# Altium PCB GPS_WS_NEO7M трафарет BOTTOM.PcbDoc
Units mm, origin at the board's own origin, x right, y up, seen from the top; angles counter-clockwise.
Board outline 32.5 x 32.5 mm, 4 copper layers (Bottom Layer, GND, PWR, Top Layer), stack 1.17 mm thick; 15 components, 25 nets, 39 pads, 0 vias.
Unrouted connection lines stored in the file: 27.
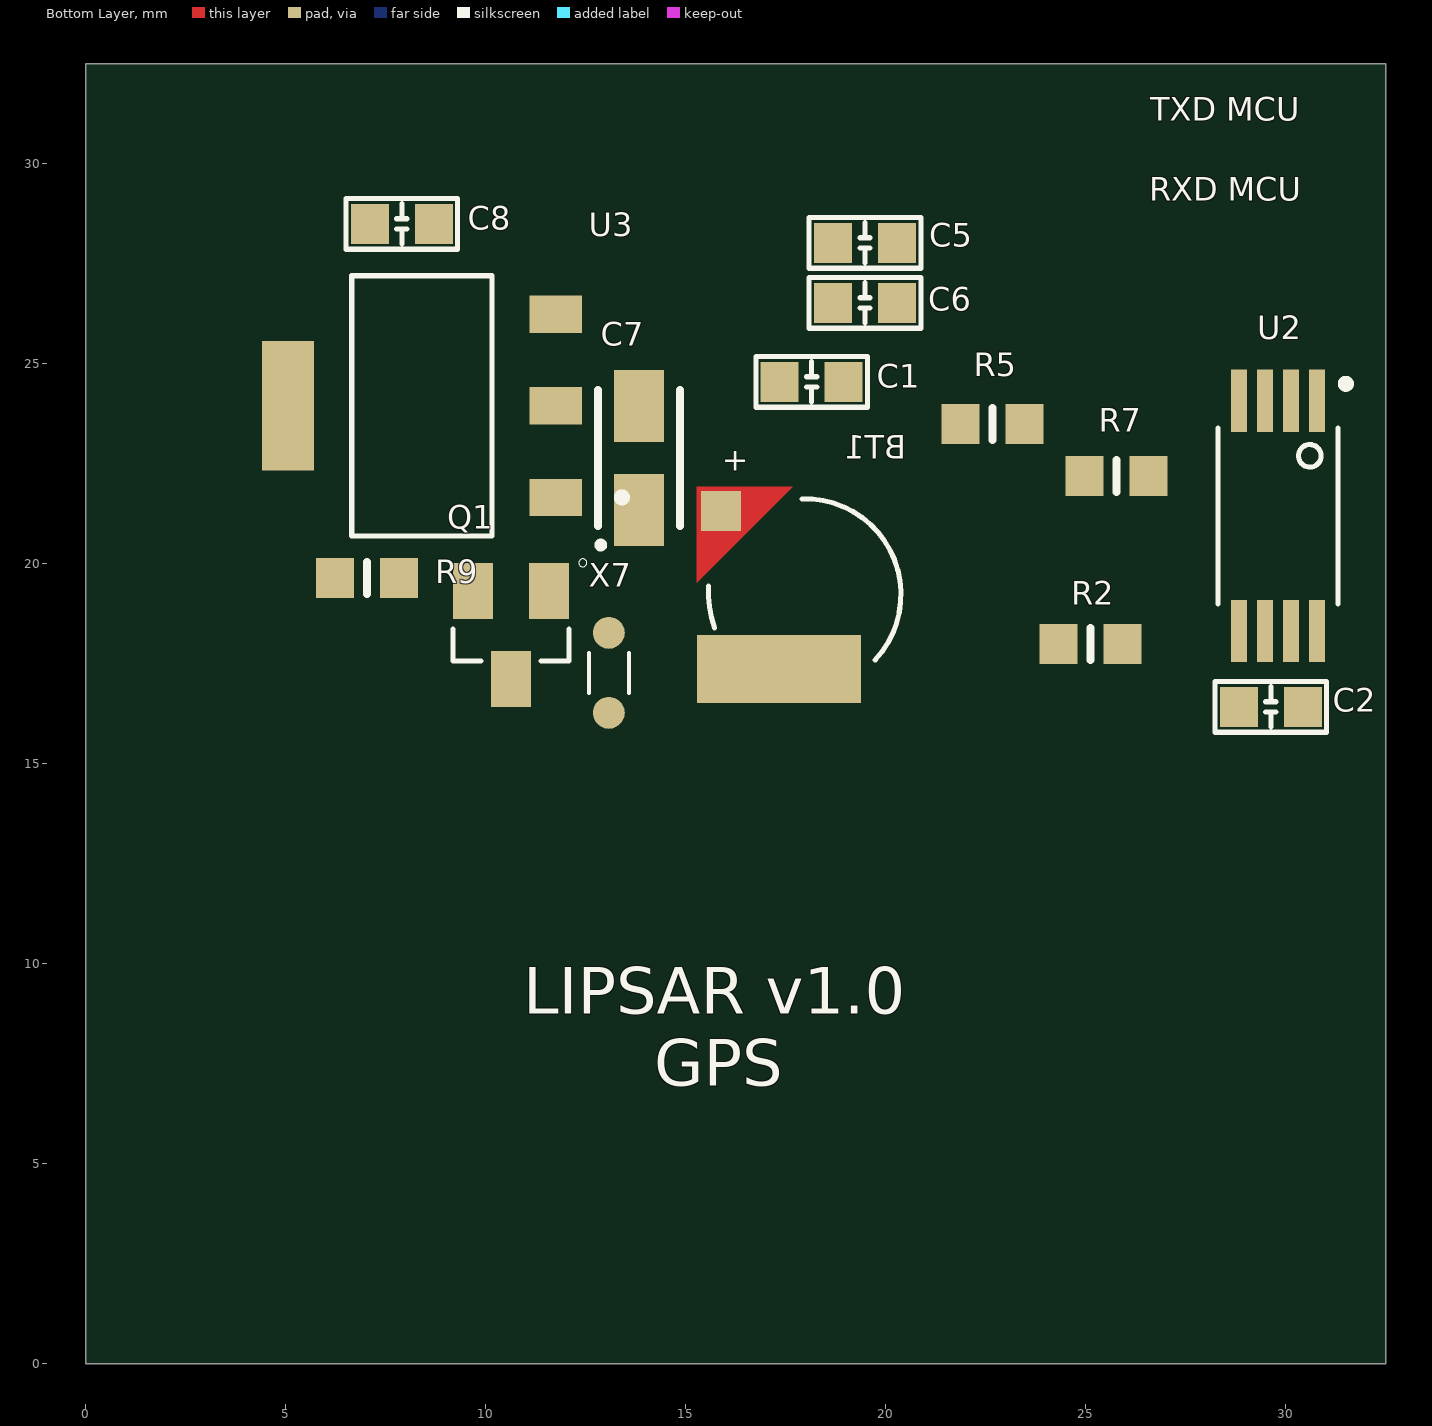
[diagram p0: Bottom Layer view]
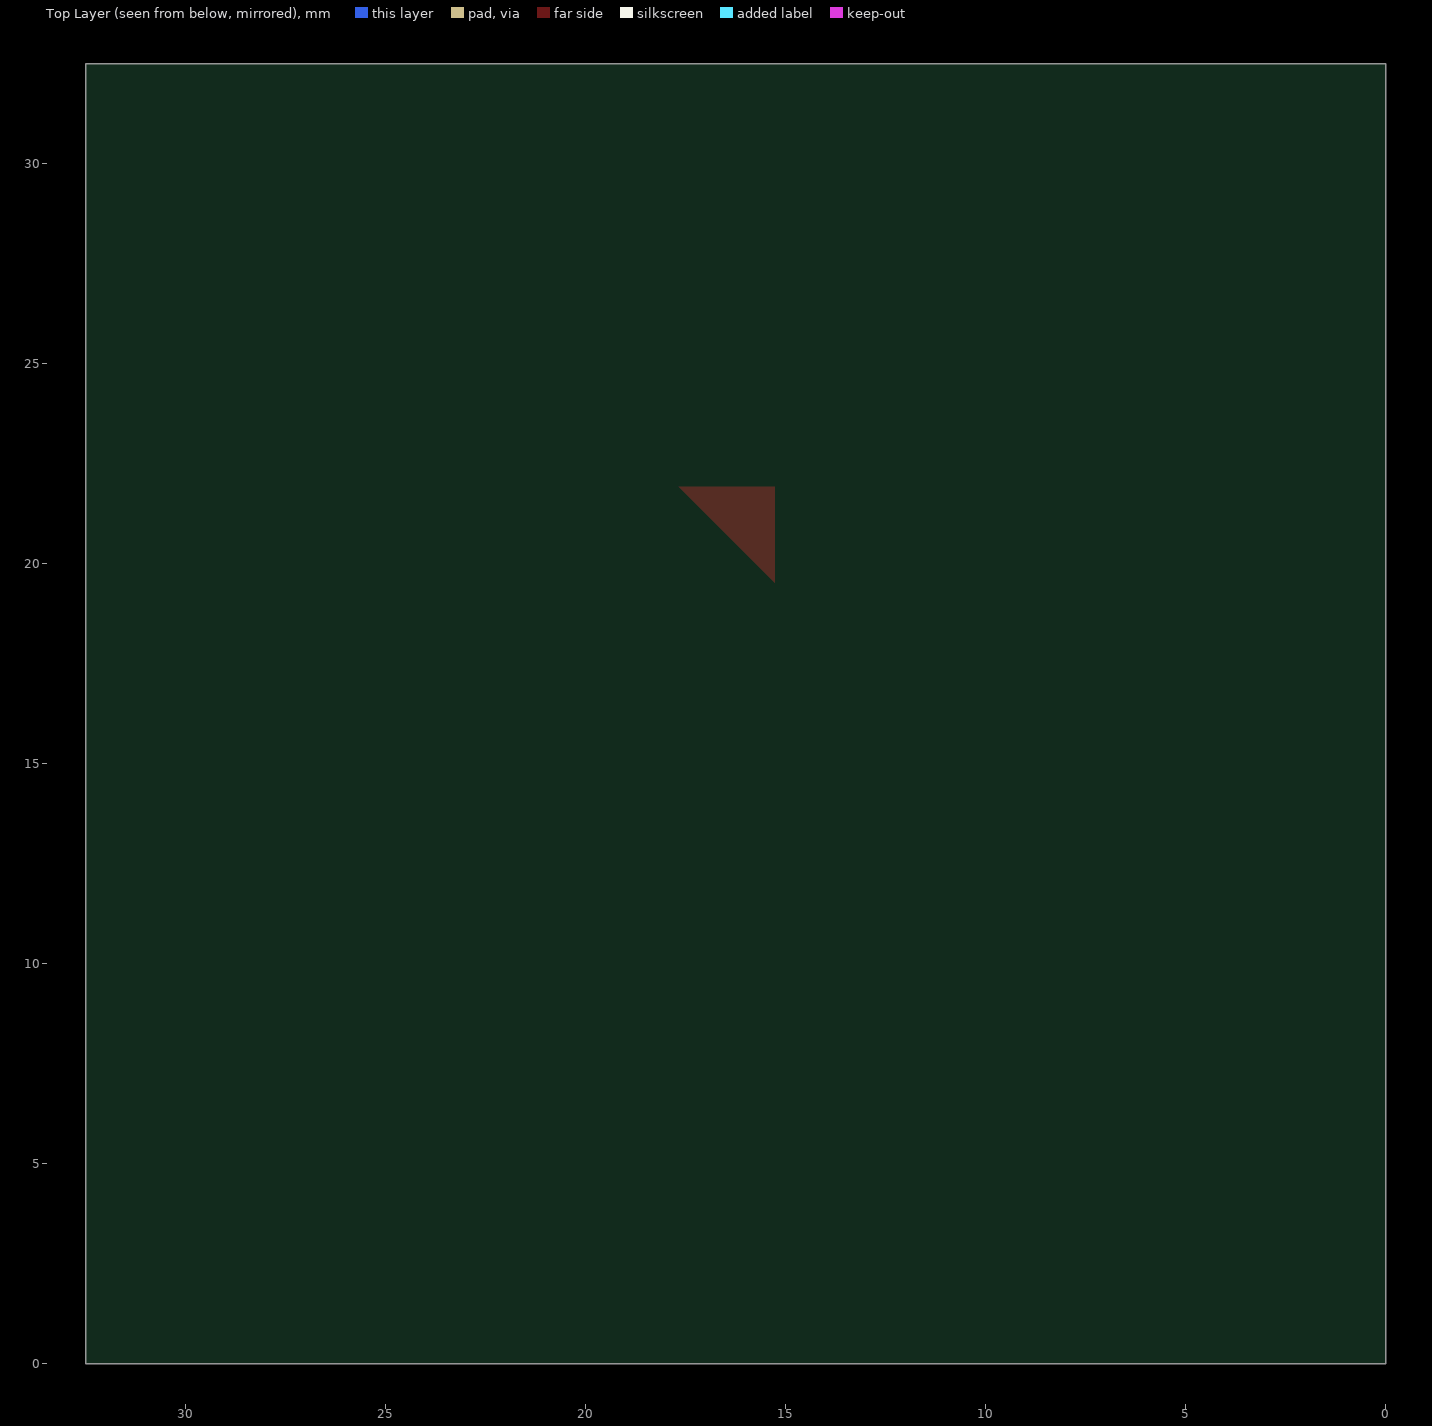
[diagram p1: Top Layer view, seen from below]

## Layer stack, top to bottom
Top Solder: solder mask 0.0254, SM-002, Dk 4
Bottom Layer: signal copper 0.045
Dielectric 2: prepreg 0.125, FR4_HiTg170 PR, Dk 5.07
Dielectric 3: prepreg 0.125, FR4_HiTg170 PR, Dk 5.07
Dielectric 8: prepreg 0.125, FR4_HiTg170 PR, Dk 5.07
GND: signal copper 0.015
Dielectric 1: core 0.3, FR4 Tg150, Dk 4.6
PWR: signal copper 0.015
Dielectric 9: prepreg 0.125, FR4_HiTg170 PR, Dk 5.07
Dielectric 4: prepreg 0.125, FR4_HiTg170 PR, Dk 5.07
Dielectric 5: prepreg 0.125, FR4_HiTg170 PR, Dk 5.07
Top Layer: signal copper 0.045
Bottom Solder: solder mask 0.0254, SM-002, Dk 4

## Board outline
0,0 0,32.5 32.5,32.5 32.5,0

## Design rules (kind name [scope] priority, off if disabled: settings)
AcuteAngle [All] p1: minimum=3.50000000000000E+0001 checktracksonly=FALSE
BoardOutlineClearance "BoardOutlineClearance 1" [All] p1: gap=0.25 ignorepadtopadclearanceinfootprint=FALSE except(0: Arc-SplitContinuation Track-SplitContinuation SMDPad-SplitContinuation THPad-SplitContinuation Via-SplitContinuation Fill-SplitContinuation Poly-SplitContinuation Region-SplitContinuation Text-SplitContinuation) // Milling
BoardOutlineClearance "BoardOutlineClearance 2" [All] p2: gap=0.4 ignorepadtopadclearanceinfootprint=FALSE except(0: Arc-SplitContinuation Track-SplitContinuation SMDPad-SplitContinuation THPad-SplitContinuation Via-SplitContinuation Fill-SplitContinuation Poly-SplitContinuation Region-SplitContinuation Text-SplitContinuation) // V-Cut
Clearance "Stitching GND" [IsStitchingVia and InNet('GND') vs (IsVia and (Not IsStitchingVia)) Or IsPad] p1: gap=0.127 ignorepadtopadclearanceinfootprint=FALSE
Clearance "Clearance-1 1/2 Oz" [All] p2: gap=0.125 ignorepadtopadclearanceinfootprint=FALSE except(0.2: Arc-Fill Arc-Poly Track-Fill Track-Poly SMDPad-SMDPad SMDPad-Fill SMDPad-Poly THPad-Fill THPad-Poly Via-Fill Via-Poly Fill-Fill Fill-Poly Poly-Poly Poly-Region Poly-Text; 0.25: Arc-Hole Track-Hole SMDPad-Hole THPad-Hole Via-Hole Fill-Hole Poly-Hole Region-Hole Text-Hole) // Standart
DiffPairsRouting "DiffPairsRouting 1 Oz" [All] p1: maxlimit=0.254 minlimit=0.2 mostfreqgap=0.254 toplayer_minwidth=0.2 toplayer_maxwidth=0.381 toplayer_prefwidth=0.381 midlayer1_minwidth=0.2 midlayer1_maxwidth=0.381 midlayer1_prefwidth=0.381 midlayer2_minwidth=0.2 midlayer2_maxwidth=0.381 midlayer2_prefwidth=0.381 bottomlayer_minwidth=0.2 bottomlayer_maxwidth=0.381 bottomlayer_prefwidth=0.381 maxuncoupledlength=12.7
DiffPairsRouting "DiffPairsRouting 1/2 Oz" [All] p2: maxlimit=0.254 minlimit=0.1 mostfreqgap=0.254 toplayer_minwidth=0.1 toplayer_maxwidth=0.381 toplayer_prefwidth=0.381 midlayer1_minwidth=0.1 midlayer1_maxwidth=0.381 midlayer1_prefwidth=0.381 midlayer2_minwidth=0.1 midlayer2_maxwidth=0.381 midlayer2_prefwidth=0.381 bottomlayer_minwidth=0.1 bottomlayer_maxwidth=0.381 bottomlayer_prefwidth=0.381 maxuncoupledlength=12.7
HoleSize "Minimum HoleSize" [IsPad] p1: absolutevalues=TRUE maxlimit=5.9 minlimit=0.6 maxpercent=80.000 minpercent=20.000
HoleSize "Minimum HoleSize VIA 1" [IsVia] p2: absolutevalues=TRUE maxlimit=5.9 minlimit=0.3 maxpercent=80.000 minpercent=20.000 // Standart
HoleToHoleClearance Hole2HoleClearance [All] p1: gap=0.25 allowstackedmicrovias=FALSE
MinimumAnnularRing "Minimum AR VIA Standart" [IsVia] p1: minimumring=0.15
MinimumAnnularRing "Minimum AR PAD Standart" [IsPAD] p2: minimumring=0.2
MinimumAnnularRing "Minimum AR VIA Advance" [IsVia] p3: minimumring=0.1
MinimumAnnularRing "Minimum AR PAD Advance" [IsPAD] p4: minimumring=0.15
MinimumSolderMaskSliver "SolderMask Bridge Standart" [All] p1: minsoldermaskwidth=0.15 // All Masks
PlaneClearance "PlaneClearance-1 1/2 Oz" [All] p1: clearance=0.2 // Standart
PlaneConnect "TermalConnect-1 1/2 Oz" [All] p1: planeconnectstyle=Direct reliefexpansion=0.2 reliefentries=4 reliefconductorwidth=0.2 reliefairgap=0.2 // Standart
PolygonConnect "PolygonConnect-1 1/2 Oz" [All] p1: connectstyle=Direct reliefconductorwidth=0.15 reliefentries=4 polygonreliefangle="90 Angle" airgapwidth=0.2 // Standart
RoutingCorners [All] p1 off: cornerstyle=45-Degree minsetback=2.54 maxsetback=2.54
RoutingVias [All] p1: holewidth=0.3 width=0.6 viastyle="Through Hole" minholewidth=0.2 minwidth=0.4 maxholewidth=5.9 maxwidth=6.4
SilkToSilkClearance Silk2SilkClearance [All] p1 off: silktosilkclearance=0.15
SilkToSolderMaskClearance Silk2SolderMaskClearance [IsPad] p1 off: minsilkscreentomaskgap=0.15 clearancetoexposedcopper=TRUE
SolderMaskExpansion [IsVia] p1: expansion=0.102 istentingtop=TRUE
SolderMaskExpansion SolderMaskExpansion-1 [All] p2: expansion=0.05 istentingtop=FALSE // Standart
SolderMaskExpansion "SolderMaskExpansion LDI" [All] p3: expansion=0.025 istentingtop=FALSE // Advance
UnRoutedNet [All] p1: checkbadconnections=TRUE
Width "Width 1/2 Oz" [All] p1: maxlimit=10 minlimit=0.1 preferedwidth=0.125 checkconnectedcopper=TRUE
20 further rules are at their usual default settings.

## Components (designator, comment, footprint, x,y, rotation, side; value= is the part's Value field where it differs from the comment)
BT1 "ML414H_IV01E" SEIKO_ML414H_IV01E 17.975,19.225 r180 top
C1 "STD_CAP" CAPC1608X90N 18.147,24.55 r0 top value="0.1 uF"
C2 "STD_CAP" CAPC1608X90N 29.625,16.425 r0 top value="0.1 uF"
C5 "STD_CAP" CAPC1608X90N 19.481,28.025 r180 top value="100 pF"
C6 "STD_CAP" CAPC1608X90N 19.481,26.525 r180 top value="100 pF"
C7 "STD_CAP_POL" CAPMP3216X180N 13.825,22.65 r90 top value="33 uF"
C8 "STD_CAP" CAPC1608X90N 7.9,28.5 r180 top value="0.47 uF"
Q1 "IRLML6401" SOT23 10.625,18.225 r180 top
R2 "STD_RES" RESC1608X50AN 25.122,18 r0 top value="4.7 kOm"
R5 "STD_RES" RESC1608X50AN 22.672,23.5 r180 top value="4.7 kOm"
R7 "STD_RES" RESC1608X50AN 25.772,22.2 r0 top value="4.7 kOm"
R9 "STD_RES" RESC1608X50AN 7.025,19.65 r180 top value="4.7 kOm"
U2 "M24C32-DRDW3TP/K" SOP65P640X120-8N 29.8,21.2 r270 top
U3 "LM" SOT229P700X180-4N 8.4,23.95 r180 top
X7 "CON2_Uni" Con2_uni 13.075,16.275 r90 top

## Footprints (in the part's own frame and the unit in brackets; to place one, negate y for a bottom-side part, rotate by r counter-clockwise, add the part's x,y. Pads: shape width x height; smd on the part's side, far side on the other; paste and mask are expansions set on the pad)
CAPC1608X90N [mm] "Chip Capacitor EIA 0603. METRIC 1608, 2-Leads, Body 1,6x0,8mm, IPC Medium Density"
  rect 0.95x1 smd mask+0.1: 1(-0.8,0) 2(0.8,0)
  silkscreen extent -1.4,-0.64 1.4,0.64, body extent -0.8,-0.45 0.8,0.45, height 0.8
CAPMP3216X180N [mm] "Tantal Capacitor,Case A, METRIC 3216-18. 2-Leads, Body 3.2x1.6mm, IPC Medium Density"
  rect 1.8x1.25 smd: 1(-1.3,0) 2(1.3,0)
  silkscreen extent -2.26,-1.02 1.7,1.03, body extent -1.6,-0.8 1.6,0.8, height 1.8
Con2_uni [mm]
  round 0.8 smd: 1(0,0) 2(2,0)
  silkscreen extent 0.5,-0.5 1.5,0.5
RESC1608X50AN [mm] "Chip Resistor, 2-Leads, Body 1,6x0,8mm, IPC Medium Density"
  rect 0.95x1 smd: 1(-0.8,0)
  rect 0.95x1 smd mask+0.1: 2(0.8,0)
  silkscreen extent 0,-0.4 0,0.4, body extent -0.8,-0.4 0.8,0.4, height 0.5
SEIKO_ML414H_IV01E [mm]
  rect 1x1 smd paste-1 mask+0: 1(2.1,-2.1)
  rect 4.1x1.7 smd: 2(0.65,1.85)
  Bottom Layer region: 2.7,-0.3 0.3,-2.7 2.7,-2.7
  silkscreen extent -2.4,-2.4 2.41,1.63, body extent -2.4,-2.4 2.4,2.4
SOP65P640X120-8N [mm]
  rect 1.56x0.4 smd: 1(-2.88,0.975) 2(-2.88,0.325) 3(-2.88,-0.325) 4(-2.88,-0.975) 5(2.88,-0.975) 6(2.88,-0.325) 7(2.88,0.325) 8(2.88,0.975)
  silkscreen extent -3.4,-1.5 2.2,1.8, body extent -3.2,-1.5 3.2,1.5, height 1.2
SOT23 [mm]
  rect 1x1.4 smd: 1(-0.95,-1.1) 2(0.95,-1.1) 3(0,1.1)
  silkscreen extent -1.9,-1.9 1.45,0.65, body extent -1.45,-1.25 1.45,1.25, height 1.1
SOT229P700X180-4N [mm]
  rect 1.31x0.93 smd: 1(-3.345,2.29) 2(-3.345,0) 3(-3.345,-2.29)
  rect 1.31x3.24 smd: 4(3.345,0)
  silkscreen extent -5.1,-3.25 1.75,3.25, body extent -3.5,-3.25 3.5,3.25, height 1.8

## Part data
BT1: "Coin, 4.8mm 3 V Lithium Battery Rechargeable (Secondary) 1mAh", Package="SOT-89 Seiko", Availability="In Stock", Check_prices=https://www.snapeda.com/parts/ML414H%20IV01E/Seiko+Instruments/view-part/?ref=eda, MF="Seiko Instruments", MP="ML414H IV01E", Price=None, Purchase-URL="https://pricing.snapeda.com/search/part/ML414H IV01E/?ref=eda", SnapEDA_Link=https://www.snapeda.com/parts/ML414H%20IV01E/Seiko+Instruments/view-part/?ref=snap
C1 C2: library part 6202, Dielectric=X7R, Manufacturer=TDK, ManufacturerPartNumber=C1608X7R1H104K, Temp_Range="-55°C to +125°C", Voltage_Range="50 V", AuthorCreation_Comp=anosova, AuthorModification_Comp=anosova, BOM="Capacitors 0603 0.1 uF ±10% 50V X7R    C1608X7R1H104K TDK", Comp_Class_Name="Capacitors Chip SMD 0603", Comp_Class_Number=200004, Comp_Description="Capacitors 0603 0.1 uF ±10% 50V X7R", Comp_ID=200004-122, ComponentLink1Description=MANUFACTURER_URL, ComponentLink1URL=https://media.digikey.com/pdf/Data%20Sheets/TDK%20PDFs/C_Series_GeneralAppl_B11.pdf, Footprint_Description="Chip Capacitor EIA 0603. METRIC 1608, 2-Leads, Body 1,60x0,8mm, IPC Medium Density", HelpURL=\\corp1\RNDlibrary\_Library\Altium_lib\Datasheet\TDK\Ceramic_Capacitors_C-Series\cseries.pdf, Human_Readable="Capacitors 0603 0.1 uF ±10% 50V X7R", Lib_Description=Capacitor, Number_Base=6202, Precision="± 10%", TimeCreation_Comp="29.10.2021 11:15:01", TimeModification_Comp="29.10.2021 11:29:43", Verified=N
C5 C6: library part 3840, Dielectric="C0G (NP0)", Manufacturer=muRata, ManufacturerPartNumber=GRM1885C2A101JA01D, Temp_Range="25 to 125°C", Voltage_Range=100V, BOM="Конденсатор 0603 100 pF ±5% 100V C0G (NP0)    GRM1885C2A101JA01D muRata", Comp_Class_Name="Capacitors Chip SMD 0603", Comp_Class_Number=200004, Comp_Description="Capacitors 0603 100 pF ±5% 100V C0G (NP0)", Comp_ID=200004-0013, ComponentLink1Description=MANUFACTURER_URL, ComponentLink1URL=http://www.murata.com/products/catalog/pdf/c02e.pdf, Footprint_Description="Chip Capacitor EIA 0603. METRIC 1608, 2-Leads, Body 1,6x0,8mm, IPC Medium Density", HelpURL=\\corp1\RNDlibrary\_Library\Altium_lib\Datasheet\muRata\Chip_Monolithic_Ceramic_Capacitors\Chip_Monolithic_Ceramic_Capacitors.pdf, Human_Readable="Конденсатор 0603 100 pF ±5% 100V C0G (NP0)", Lib_Description=Capacitor, Number_Base=3840, Precision=±5%, TimeModification_Comp="06.12.2011 14:46:16"
C7: library part 4456, Manufacturer=Kemet, ManufacturerPartNumber=T491A336K010AT, Temp_Range="-55°C to +125°C", Voltage_Range=10V, BOM="Конденсатор танталовый корпус A  METRIC 3216-18   33 uF 10% 10V    T491A336K010AT Kemet", Comp_Class_Name="Capacitors Tantal", Comp_Class_Number=2010, Comp_Description="Tantal Capacitor Case A  METRIC 3216-18   33 uF 10% 10V", Comp_ID=2010-0363, ComponentLink1Description=MANUFACTURER_URL, ComponentLink1URL=http://www.kemet.com/kemet/web/homepage/kechome.nsf/weben/9F2DE33590D9247E8525788D0059B1E1/$file/KEM_TC101_STD.pdf, Footprint_Description="Tantal Capacitor,Case A, METRIC 3216-18. 2-Leads, Body 3.2x1.6mm, IPC Medium Density", HelpURL=\\corp1\RNDlibrary\_Library\Altium_lib\Datasheet\KEMET\T491\KEM_TC101_STD.pdf, Human_Readable="Конденсатор танталовый корпус A  METRIC 3216-18   33 uF 10% 10V", Lib_Description="Polar Capacitor", Number_Base=4456, Precision=10%, TimeModification_Comp="08.12.2011 13:13:16"
C8: library part 3938, Dielectric=X7R, Manufacturer=muRata, ManufacturerPartNumber=GRM188R71A474KA61D, Temp_Range="-55 to 125°C", Voltage_Range=10V, BOM="Конденсатор 0603 0.47 uF ±10% 10V X7R    GRM188R71A474KA61D muRata", Comp_Class_Name="Capacitors Chip SMD 0603", Comp_Class_Number=200004, Comp_Description="Capacitors 0603 0.47 uF ±10% 10V X7R", Comp_ID=200004-0111, ComponentLink1Description=MANUFACTURER_URL, ComponentLink1URL=http://www.murata.com/products/catalog/pdf/c02e.pdf, Footprint_Description="Chip Capacitor EIA 0603. METRIC 1608, 2-Leads, Body 1,6x0,8mm, IPC Medium Density", HelpURL=\\corp1\RNDlibrary\_Library\Altium_lib\Datasheet\muRata\Chip_Monolithic_Ceramic_Capacitors\Chip_Monolithic_Ceramic_Capacitors.pdf, Human_Readable="Конденсатор 0603 0.47 uF ±10% 10V X7R", Lib_Description=Capacitor, Number_Base=3938, Precision=±10%, TimeModification_Comp="06.12.2011 14:46:17"
Q1: "P-Channel 12V 4.3A (Ta) 1.3W (Ta) Surface Mount Micro3â„¢/SOT-23", Package="SOT-23 International Rectifier", Availability=Unavailable, Check_prices=https://www.snapeda.com/parts/IRLML6401/International%20Rectifier/view-part/557178/?ref=eda, MF="International Rectifier", MP=IRLML6401, Price=None, SnapEDA_Link=https://www.snapeda.com/parts/IRLML6401/International%20Rectifier/view-part/557178/?ref=snap
R2 R5 R7 R9: library part 89, Manufacturer=Yageo, ManufacturerPartNumber=RC0603JR-074K7L, Power_Range=0.1W, Temp_Range="-55 °C to +155 °C", BOM="Резистор 0603 5% E24 4,7 кОм    RC0603JR-074K7L Yageo", Comp_Class_Name="Resistors Chip SMD 0603 5% E24", Comp_Class_Number=10000403, Comp_Description="Resistor 0603 5% E24 4.7 kOm", Comp_ID=10000403-089, ComponentLink1Description=MANUFACTURER_URL, ComponentLink1URL=http://www.yageo.com/documents/recent/PYu-RC0603_51_RoHS_L_4.pdf, Footprint_Description="Chip Resistor EIA 0603. METRIC 1608, 2-Leads, Body 1,6x0,8mm, IPC Medium Density", HelpURL=\\CORP1\RNDlibrary\_Library\Altium_lib\Datasheet\Yageo\RC0603\PYu-RC0603_51_RoHS_L_4.pdf, Human_Readable="Резистор 0603 5% E24 4,7 кОм", Lib_Description=Resistor, Number_Base=89, Precision=5%, Price=0,00600000005215406, TimeModification_Comp="06.12.2011 13:32:14", Verified=N
U2: "M24C02-F Series 2 Kb (256 x 8) 5.5 V Serial IÂ²C bus EEPROMs - TSSOP-8", Package=None, Availability=Unavailable, MP=M24C32-DRDW3TP/K, Price=None
U3: "Sot223/Pkg 1-Amp 3.3-Volt Low Drop Out Voltage Regulatator", Package="SOT-223 Seeed Technology", Availability="Not in stock", Check_prices=https://www.snapeda.com/parts/AMS1117-3.3/Advanced+Monolithic+Systems/view-part/?ref=eda, MF="Advanced Monolithic Systems", MP=AMS1117-3.3, Price=None, SnapEDA_Link=https://www.snapeda.com/parts/AMS1117-3.3/Advanced+Monolithic+Systems/view-part/?ref=snap
X7: "Коннектор для соединения плат"

## Nets (pads, with @x,y where several pads share a name; then routed paths per layer and width w, separated by ;. In a path a pad name is that pad's centre, name@x,y a point inside that pad or via, vN(x,y) a via of type N, cw(c..) or ccw(c..) an arc to the next point about the centre after c; other vN are vias at no path point)
3V3: C1.2 C2.2 Q1.3 R2.2 R5.1 R7.1 U2.8
ANT_ON: 
Charge_Bat: Q1.1 R9.2
GND: BT1.2 C1.1 C2.1 C5.2 C6.2 C7.2 C8.2 R9.1 U2.1 U2.2 U2.3 U2.4 U2.7 U3.2 U3.4
NetANT1_1: 
NetBT1_1: BT1.1
NetC3_2: 
NetC7_1: C7.1 Q1.2 U3.3
NetD1_A: 
NetL1_1: 
NetL1_2: 
NetL2_2: 
NetR1_2: 
NetR2_1: R2.1
NetR3_2: 
NetR6_2: 
RXD_MCU: 
SCL: X7.2
SCL_GPS: R5.2 U2.6
SDA: X7.1
SDA_GPS: R7.2 U2.5
TXD_MCU: 
Vbat: C8.1 U3.1
VBCKP: C5.1 C6.1
VCC_RF: 

## Silkscreen, mask and mechanical layers (free items; w line width, h text height)
Top Overlay:
  text "TXD MCU" at 26.61,30.88 h1
  text "RXD MCU" at 26.584,28.88 h1
  text "LIPSAR v1.0" at 10.936,8.359 h2
  text "GPS" at 14.205,6.559 h2

## Text inside footprints (layer, text, board x,y; h text height)
BT1: Top Overlay "+" at 16.575,22.125 h1